# Altium PCB USB_Interruptor.PcbDoc
Units mm, origin at the board's own origin, x right, y up, seen from the top; angles counter-clockwise.
Board outline 28.19 x 20 mm, 2 copper layers (Top Layer, Bottom Layer); 10 components, 9 nets, 39 pads, 13 vias.
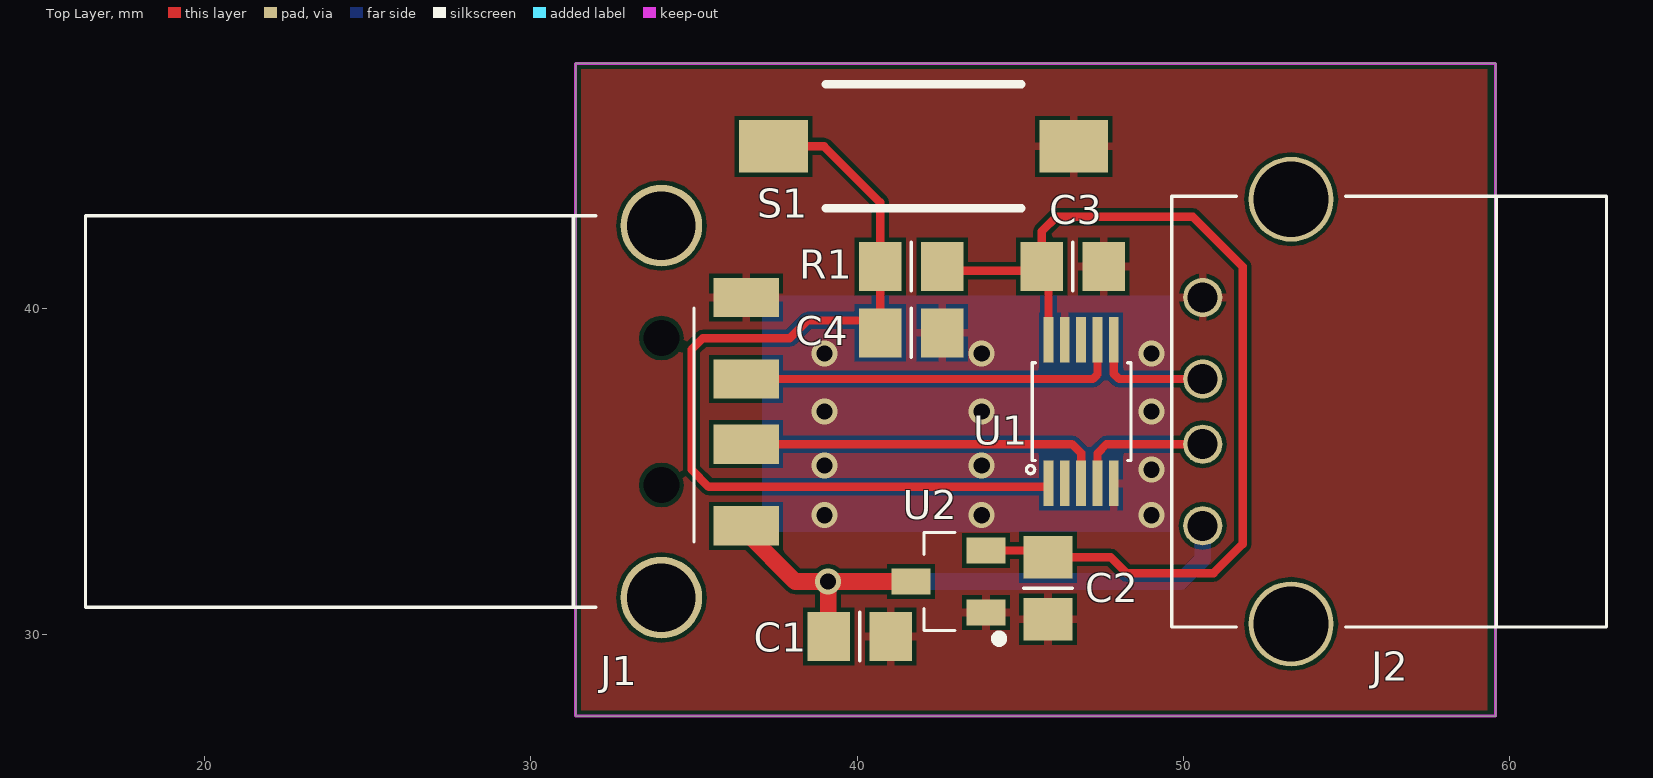
[diagram p0: Top Layer view]
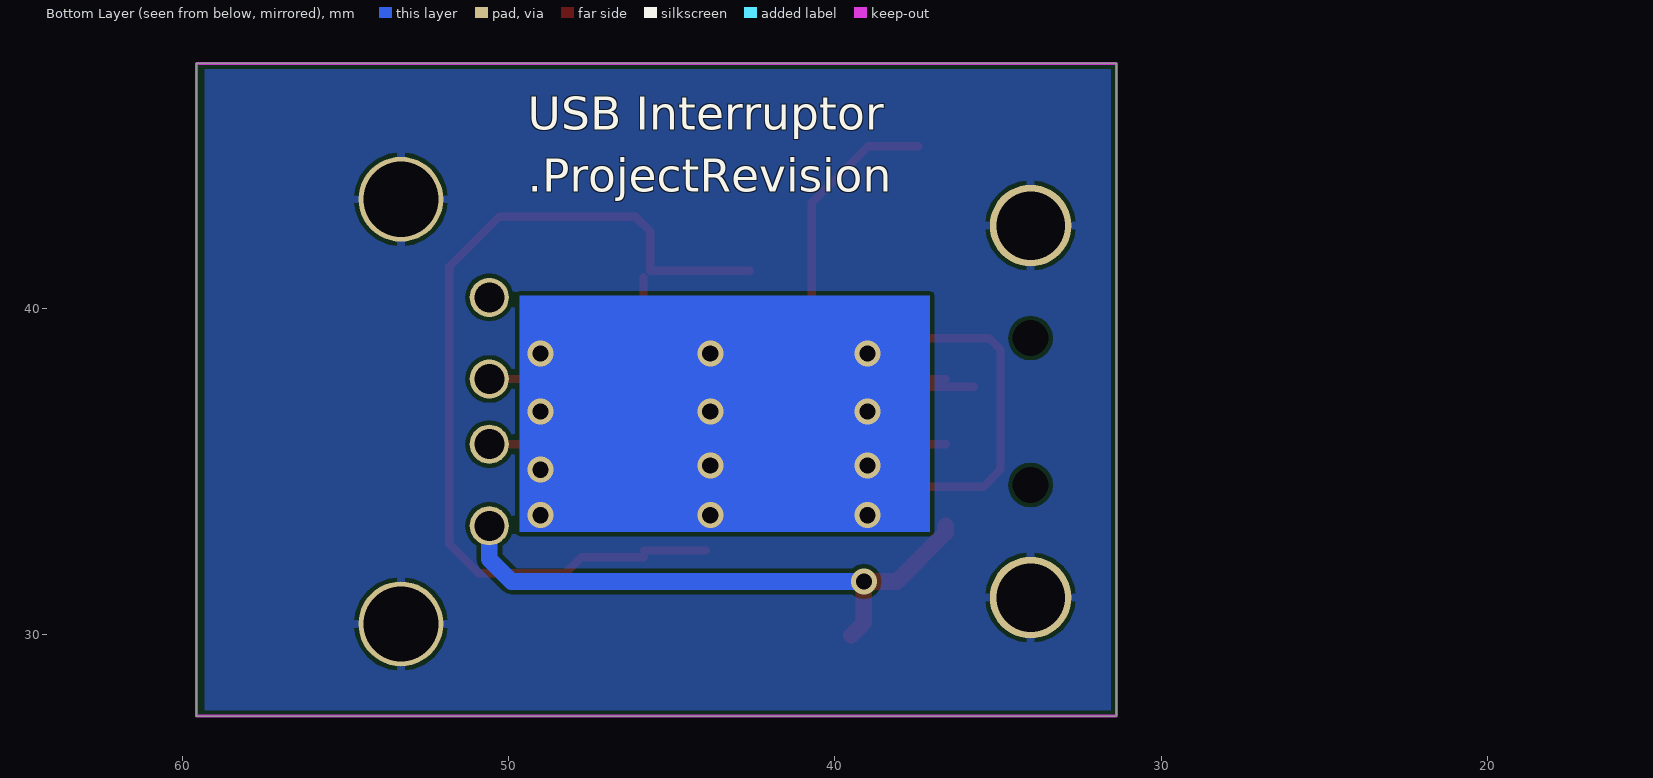
[diagram p1: Bottom Layer view, seen from below]

## Layer stack, top to bottom
Top Solder: solder mask 0.0102, Solder Resist, Dk 3.5
Top Layer: signal copper 0.0356
Dielectric 1: dielectric 0.32, FR-4, Dk 4.8
Bottom Layer: signal copper 0.0356
Bottom Solder: solder mask 0.0102, Solder Resist, Dk 3.5

## Board outline
31.369,27.5 59.563,27.5 59.563,47.5 31.369,47.5

## Design rules (kind name [scope] priority, off if disabled: settings)
Clearance [All] p1: gap=0.127
PolygonConnect PolygonConnect_Via [isvia] p1: connectstyle=Direct reliefconductorwidth=0.254 reliefentries=4 polygonreliefangle="90 Angle" airgapwidth=0.254
PolygonConnect [All] p2: connectstyle=Relief reliefconductorwidth=0.254 reliefentries=4 polygonreliefangle="90 Angle" airgapwidth=0.127
RoomDefinition USB_Interruptor [InComponentClass('USB_Interruptor')] p1: confinementstyle=ConfineIn formatcopy=TRUE lockcomponents=FALSE outline 13.5,27.559 69.469,27.559 69.469,47.117 13.5,47.117
RoutingVias [All] p1: holewidth=0.711 width=1.27 viastyle="Through Hole" minholewidth=0.711 minwidth=1.27 maxholewidth=0.711 maxwidth=1.27
SilkToBoardRegionClearance [All] p1 off:
SilkToSolderMaskClearance [IsPad] p1: minsilkscreentomaskgap=0.152 clearancetoexposedcopper=TRUE
SolderMaskExpansion [All] p1: expansion=0.102
Width [All] p1: maxlimit=1.016 minlimit=0.152 preferedwidth=0.254
28 further rules are at their usual default settings.

## Components (designator, comment, footprint, x,y, rotation, side; value= is the part's Value field where it differs from the comment)
C1 "100nF" CCNP2012-0805 40.08,29.938 r0 top
C2 "1uF" CCNP2012-0805 45.847,31.415 r90 top
C3 "100nF" CCNP2012-0805 46.609,41.275 r0 top
C4 "10nF" CCNP2012-0805 41.656,39.243 r0 top
J1 "USB Type A Plug" "USB_TypeA Plug" 34,36.83 r0 top
J2 "USB Type A Socket" USB-A-SOCKET 51.943,36.83 r180 top
R1 "10K" CR2012-0805 41.656,41.275 r0 top
S1 "SW_PB-SMT-FSMSM" SW_MIN_PB-FSMSM 42.037,44.958 r180 top
U1 "FSUSB30" MSOP-10 46.863,36.83 r0 top
U2 "MCP1703T-3302E/CB" SOT23 42.799,31.623 r90 top

## Footprints (in the part's own frame and the unit in brackets; to place one, negate y for a bottom-side part, rotate by r counter-clockwise, add the part's x,y. Pads: shape width x height; smd on the part's side, far side on the other; paste and mask are expansions set on the pad)
CCNP2012-0805 [mm]
  rect 1.3x1.5 smd: 1(-0.95,0) 2(0.95,0)
  silkscreen extent 0,-0.75 0,0.75, body extent -1,-0.62 1,0.63, height 0.78
CR2012-0805 [mm]
  rect 1.3x1.5 smd: 1(-0.95,0) 2(0.95,0)
  silkscreen extent 0,-0.75 0,0.75, body extent -1.15,-0.67 1.15,0.68, height 0.76
MSOP-10 [mm] "MSOP-10 - JEDEC MO-187, 3mm wide"
  rect 0.3x1.4 smd: 1(-1,-2.2) 2(-0.5,-2.2) 3(0,-2.2) 4(0.5,-2.2) 5(1,-2.2) 6(1,2.2) 7(0.5,2.2) 8(0,2.2) 9(-0.5,2.2) 10(-1,2.2)
  silkscreen extent -1.67,-1.9 1.53,1.5, body extent -1.6,-2.63 1.6,2.52, height 1.09
SOT23 [mm] "SOT-23; 3 Leads; Body 3.0 x 2.3 mm, inc. leads (LxW max)"
  rect 0.8x1.2 smd: 1(-0.95,-1.15) 2(0.95,-1.15) 3(0,1.15)
  silkscreen extent -1.88,-1.67 1.5,0.75, body extent -1.5,-1.25 1.5,1.25, height 1.05
SW_MIN_PB-FSMSM [mm] "TE CONNECTIVITY / ALCOSWITCH  FSMSM  SWITCH, TACTILE SPST 50mA, SMD GULL WING"
  rect 2.11x1.6 smd: 1(4.6,0) 2(-4.6,0)
  silkscreen extent -3,-1.9 3,1.9, body extent -4.98,-1.75 4.98,1.75, height 4.4
USB-A-SOCKET [mm] "USB-A-Socket PCB Mount (F1275535)"
  round 1.2 hole 0.92: 5V(1.355,3.5) D+(1.355,-1) D-(1.355,1) Gnd(1.355,-3.5)
  round 2.6 hole 2.3: Shield1(-1.355,6.507) Shield2(-1.355,-6.507)
  silkscreen extent -11.02,-6.6 2.3,6.6, body extent -11.71,-7.31 2.29,7.19, height 7.64
"USB_TypeA Plug" [mm] "USB-Type A Male PCB (F2131387)"
  round 1 hole 1.1: 0(0,-2.25) 0(0,2.25)
  rect 2x1.2 smd: 5V(2.6,-3.5) D+(2.6,1) D-(2.6,-1) Gnd(2.6,3.5)
  round 2.5 hole 2.1: Shield1(0,5.7) Shield2(0,-5.7)
  silkscreen extent -17.65,-6 1,6, body extent -17.8,-6.38 3.48,6.32, height 3.05

## Part data
C1 C2 C3 C4: library part Cap_CCNP_0805, "Capacitor SMT 0805"
J1: library part USB_TYPE_A_PLUG, "USB A Plug"
J2: library part USB_TYPE_A_SOCKET, "AMPHENOL FCI  87520-0010BLF"
R1: library part Res_CR0805, "Resistor"
S1: "SWITCH, TACTILE SPST 50mA, SMD GULL WING"
U1: "USB Switch"
U2: "3V3 LDO regulator"

## Via types
v1: diameter 0.8, hole 0.5, Top Layer to Bottom Layer, tented both sides, 13 vias

## Nets (pads, with @x,y where several pads share a name; then routed paths per layer and width w, separated by ;. In a path a pad name is that pad's centre, name@x,y a point inside that pad or via, vN(x,y) a via of type N, cw(c..) or ccw(c..) an arc to the next point about the centre after c; other vN are vias at no path point)
+5V: C1.1 J1.5V J2.5V U2.3 | length 20.2
  Top Layer w0.508: J1.5V 36.6,33.123 38.1,31.623 v1(39.109,31.623) ; C1.1@39.497,29.972 39.109,30.36 v1(39.109,31.623) ; U2.3@41.341,31.623 v1(39.109,31.623)
  Bottom Layer w0.508: v1(39.109,31.623) 49.911,31.623 50.588,32.3 J2.5V
D+: J2.D+ U1.6 | length 3.8
  Top Layer w0.254: U1.6 47.863,37.989 48.022,37.83 J2.D+@50.562,37.83
D-: J2.D- U1.4 | length 4.3
  Top Layer w0.254: U1.4 47.363,35.552 47.641,35.83 J2.D-
DM: J1.D- U1.3 | length 11.3
  Top Layer w0.254: J1.D- 36.603,35.833 46.59,35.833 46.863,35.56 U1.3
DP: J1.D+ U1.7 | length 13.3
  Top Layer w0.254: J1.D+@35.747,37.592 J1.D+@37.161,37.592 ; J1.D+ 47.228,37.83 47.363,37.965 U1.7
GND: J1.Shield1 J1.Shield2 J2.Shield1 J2.Shield2
SEL: C4.1 R1.1 S1.1 U1.1 | length 28.3
  Top Layer w0.254: S1.1 38.989,44.958 40.706,43.241 R1.1 C4.1 ; 40.005,39.624 38.481,39.624 37.937,39.08 35.27,39.08 34.925,38.735 34.925,35.052 35.452,34.525 45.758,34.525 U1.1
SGND: C1.2 C2.1 C3.2 C4.2 J1.Gnd J2.Gnd S1.2 U1.5 U1.9 U2.1
  other v1: 39,33.655 43.815,33.655 49.022,33.655 49.022,35.052 39,35.179 43.815,35.179 39,36.83 43.815,36.83 49.022,36.83 39,38.608 43.815,38.608 49.022,38.608
VCC: C2.2 C3.1 R1.2 U1.10 U2.2 | length 30.1
  Top Layer w0.254: R1.2@42.606,41.148 45.659,41.148 45.659,42.357 46.101,42.799 50.292,42.799 51.816,41.275 51.816,32.766 50.927,31.877 48.26,31.877 47.772,32.365 C2.2 ; U2.2 C2.2@45.847,32.573 ; U1.10 C3.1@45.863,40.944
pads on no net: J1.0 U1.2 U1.8

## Polygon pours and split planes (outlines as drawn)
SGND on Top Layer "Top Layer-usb-shield" (solid, remove dead copper, pour order 4): 31.5,47.5 59.309,47.5 59.309,27.5 31.5,27.5
GND on Bottom Layer "Top Layer-usb-shield" (solid, remove dead copper, pour order 3): 31.5,47.5 59.309,47.5 59.309,27.5 31.5,27.5

## Keep-outs
Keep-Out Layer:
  the board outline again, w0.1

## Other copper
Bottom Layer:
  rectangle net SGND: 37.084,33.147 49.657,40.386

## Silkscreen, mask and mechanical layers (free items; w line width, h text height)
Bottom Overlay:
  text "USB Interruptor" at 49.403,45.466 h1.02
  text ".ProjectRevision" at 49.403,43.561 h1.02